# Altium PCB BJTSOT343_DCBias.PcbDoc
Units mm, origin at the board's own origin, x right, y up, seen from the top; angles counter-clockwise.
Board outline 40 x 8 mm, 2 copper layers (Top Layer, Bottom Layer); 9 components, 5 nets, 23 pads, 6 vias.
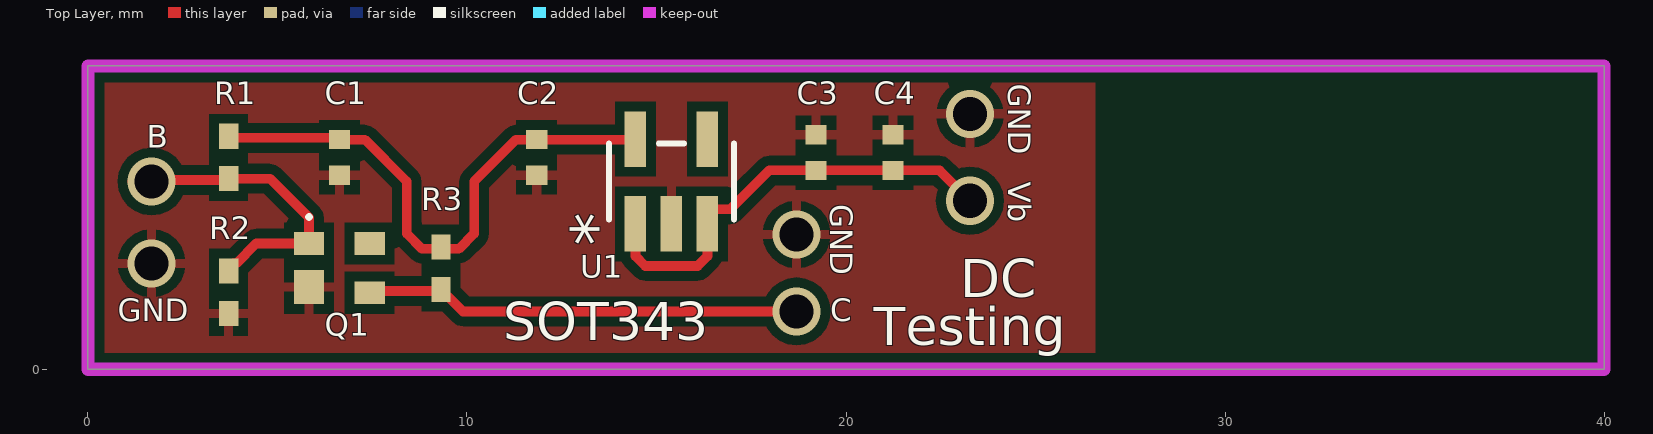
[diagram p0: Top Layer view]
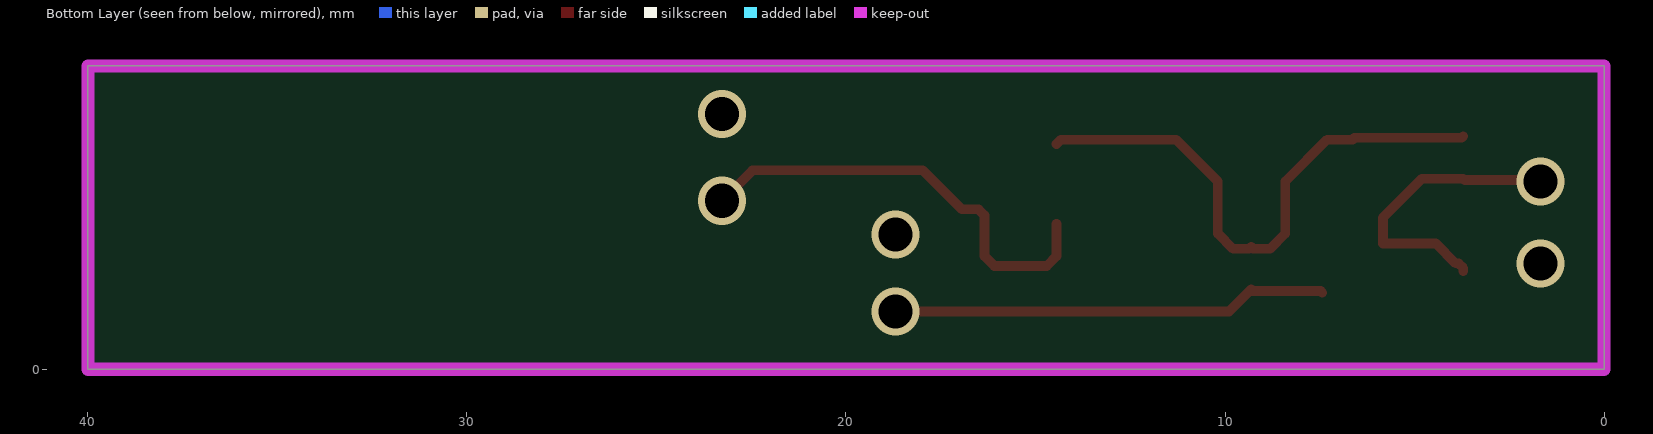
[diagram p1: Bottom Layer view, seen from below]

## Layer stack, top to bottom
Top Solder: solder mask 0.0102, Solder Resist, Dk 3.5
Top Layer: signal copper 0.0356
Dielectric 1: dielectric 0.32, FR-4, Dk 4.8
Bottom Layer: signal copper 0.0356
Bottom Solder: solder mask 0.0102, Solder Resist, Dk 3.5

## Board outline
0,0 0,8 40,8 40,0

## Design rules (kind name [scope] priority, off if disabled: settings)
Clearance [All] p1: gap=0.254 ignorepadtopadclearanceinfootprint=FALSE except(0: Arc-Hole Track-Hole SMDPad-Hole THPad-Hole Via-Hole Fill-Hole Poly-Hole Region-Hole Text-Hole)
PolygonConnect [All] p1: connectstyle=Relief reliefconductorwidth=0.254 reliefentries=4 polygonreliefangle="90 Angle" airgapwidth=0.254
RoomDefinition BJTSOT343_DCBias [InComponentClass('BJTSOT343_DCBias')] p1: confinementstyle=ConfineIn formatcopy=TRUE lockcomponents=FALSE outline 40.005,8 0,8 0,0 40.005,0
RoutingVias [All] p1: holewidth=0.711 width=1.27 viastyle="Through Hole" minholewidth=0.711 minwidth=1.27 maxholewidth=0.711 maxwidth=1.27
SolderMaskExpansion [All] p1: expansion=0.102
Width [All] p1: maxlimit=0.254 minlimit=0.254 preferedwidth=0.254
30 further rules are at their usual default settings.

## Components (designator, comment, footprint, x,y, rotation, side; value= is the part's Value field where it differs from the comment)
C1 "" YAG_CC0402 6.632,5.587 r90 top value=Value
C2 "" YAG_CC0402 11.839,5.587 r90 top value=Value
C3 "" YAG_CC0402 19.205,5.714 r270 top value=Value
C4 "" YAG_CC0402 21.237,5.714 r270 top value=Value
Q1 "" INF-SOT343_V 6.632,2.666 r0 top
R1 "" RC0402N 3.711,5.587 r270 top value=Value
R2 "" RC0402N 3.711,2.031 r270 top value=Value
R3 "" RC0402N 9.312,2.666 r270 top value=Value
U1 "" DBV5 15.395,4.952 r90 top value=Value

## Footprints (in the part's own frame and the unit in brackets; to place one, negate y for a bottom-side part, rotate by r counter-clockwise, add the part's x,y. Pads: shape width x height; smd on the part's side, far side on the other; paste and mask are expansions set on the pad)
DBV5 [mil]
  rect 57.56x22.36 smd paste+0 mask+0: 1(-44,37.4) 2(-44,0) 3(-44,-37.4) 4(44,-37.4) 5(44,37.4)
  silkscreen extent -40,-65 40,65, body extent 0,0 10,10, height 10
INF-SOT343_V [mm] "SOT343, 4-Leads, Body 2x1.25 mm"
  rect 0.8x0.6 smd: 1(-0.8,0.65) 3(0.8,-0.65) 4(0.8,0.65)
  rect 0.8x0.9 smd: 2(-0.8,-0.5)
  silkscreen extent -0.85,1.3 -0.75,1.4, body extent -0.63,-1 0.63,1, height 1
RC0402N [mil]
  rect 26x20 smd: 1(-22,0) 2(22,0)
  body extent 0,0 10,10, height 10
YAG_CC0402 [mil]
  rect 20x22 smd paste+0 mask+0: 1(-18.5,0) 2(18.5,0)
  body extent 0,0 10,10, height 10

## Part data
C1 C2 C3 C4: library part CC0402KRX7R9BB10, "No Description Available", Manufacturer_Part_Number=CC0402KRX7R9BB103, Built_By=EMA_UL_Team, Copyright="Copyright (C) 2018 Accelerated Designs. All rights reserved", RefDes=RefDes, Type=DEV, Vendor=Yageo
Q1: library part BFP720, "SiGe:C Heterojunction Wideband RF Bipolar Transistor, 4 V VCEO, 20 mA IC, 26 dB Gmax, SOT343, Green", Manufacturer=Infineon, ComponentLink1Description="Manufacturer URL", ComponentLink1URL=http://www.infineon.com/, ComponentLink2Description=Datasheet, ComponentLink2URL=http://www.infineon.com/dgdl/bfp720.pdf?folderId=db3a30431400ef68011425b291f205c5&fileId=db3a30431ddc9372011e2620465946bc&location=en.Products.RF.RF_Transistors_.Ultra_Low_Noise_SiGe_C_Transistors_for_use_up_to_12_GHz.DATASHEET.bfp720.pdf, ComponentLink3Description="Package Specification", ComponentLink3URL=http://www.infineon.com/dgdl/SOT343-Package_Overview.pdf?folderId=db3a30431936bc4b0119535155343cba&fileId=db3a30431936bc4b0119535a9f393cd3, DatasheetVersion="Rev. 1.0", Gmax (typ)="26 dB", Green=yes, Group="Ultra low noise SiGe", Halogen-free=yes, IC (max)="20 mA", Mounting Technology="Surface Mount", NFmin (typ)="0.5 dB", PackageDescription="4-Pin Small Outline Transistor Package, 1.25 x 2 mm Body", PackageReference=SOT343, PartNumber=BFP720, Ptot (max)=80mW, VCEO (max)="4 V"
R1 R2 R3: library part RC0402JR-070RL, "No Description Available", Built_By=EMA_UL_Team, Copyright="Copyright (C) 2018 Accelerated Designs. All rights reserved", Manufacturer_Part_Number=RC0402JR-070RL, RefDes=RefDes, Type=DEV, Vendor=Yageo
U1: library part LP5907MFX-3.3/NO, "No Description Available", Manufacturer_Part_Number=LP5907MFX-3.3/NOPB, Built_By=EMA_UL_Team, Copyright="Copyright (C) 2018 Accelerated Designs. All rights reserved", RefDes=RefDes, Type=DEV, Vendor="Texas Instruments"

## Via types
v1: diameter 1.27, hole 0.9, Top Layer to Bottom Layer, 6 vias

## Nets (pads, with @x,y where several pads share a name; then routed paths per layer and width w, separated by ;. In a path a pad name is that pad's centre, name@x,y a point inside that pad or via, vN(x,y) a via of type N, cw(c..) or ccw(c..) an arc to the next point about the centre after c; other vN are vias at no path point)
B: Q1.1 R1.2 R2.1 | length 7.8
  Top Layer w0.254: v1@1.171,4.952 v1@1.209,4.991 ; v1(1.679,4.952) 1.717,4.991 3.673,4.991 R1.2 4.801,5.029 5.832,3.998 Q1.1 4.437,3.317 3.914,2.793 3.838,2.793 3.711,2.666 R2.1
C: Q1.3 R3.2 | length 11.5
  Top Layer w0.254: Q1.3 7.478,2.062 9.266,2.062 R3.2 9.896,1.523 v1(18.697,1.523)
GND: C1.1 C2.1 C3.1 C4.1 Q1.2 R2.2 U1.2
  other v1: 1.679,2.793 18.697,3.555 23.269,6.73
Vbatt: C3.2 C4.2 U1.1 U1.3 | length 11.9
  Top Layer w0.254: U1.1 14.445,2.982 14.704,2.723 16.086,2.723 16.345,2.982 U1.3 ; U1.3@16.345,3.708 16.345,4.059 16.502,4.216 16.944,4.216 17.973,5.245 C3.2 C4.2 22.469,5.245 v1(23.269,4.444)
Vcc: C1.2 C2.2 R1.1 R3.1 U1.5 | length 14.9
  Top Layer w0.254: R1.1 3.755,6.102 6.588,6.102 C1.2 7.305,6.057 8.41,4.952 8.41,3.577 8.813,3.174 9.261,3.174 R3.1 9.363,3.174 9.785,3.174 10.188,3.577 10.188,4.952 11.293,6.057 C2.2 14.331,6.057 U1.5@14.445,5.943
pads on no net: Q1.4 U1.4

## Polygon pours and split planes (outlines as drawn)
GND on Top Layer "Top Layer-GND" (solid, pour order 0): 0.028,7.873 0.155,8 26.444,8 26.571,7.873 26.571,0.126 26.444,-0.001 0.155,-0.001 0.028,0.126

## Keep-outs
Keep-Out Layer:
  the board outline again, w0.35

## Silkscreen, mask and mechanical layers (free items; w line width, h text height)
Top Overlay:
  text "GND" at 24.285,7.53 h0.6 r270
  text "B" at 1.552,5.841 h0.6
  text "Vb" at 24.285,4.944 h0.6 r270
  text "GND" at 19.586,4.355 h0.6 r270
  text "DC" at 23.015,1.904 h1
  text "GND" at 0.79,1.269 h0.6
  text "C" at 19.586,1.269 h0.6
  text "SOT343" at 10.95,0.761 h1
  text "Testing" at 20.729,0.634 h1

## Text inside footprints (layer, text, board x,y; h text height)
U1: Top Overlay "*" at 14.004,3.263 h1.27 r90; Mechanical 13 "*" at 14.969,4.013 h1.27 r90